# EAGLE board board-beta.0.2 (EAGLE 7.7.0)
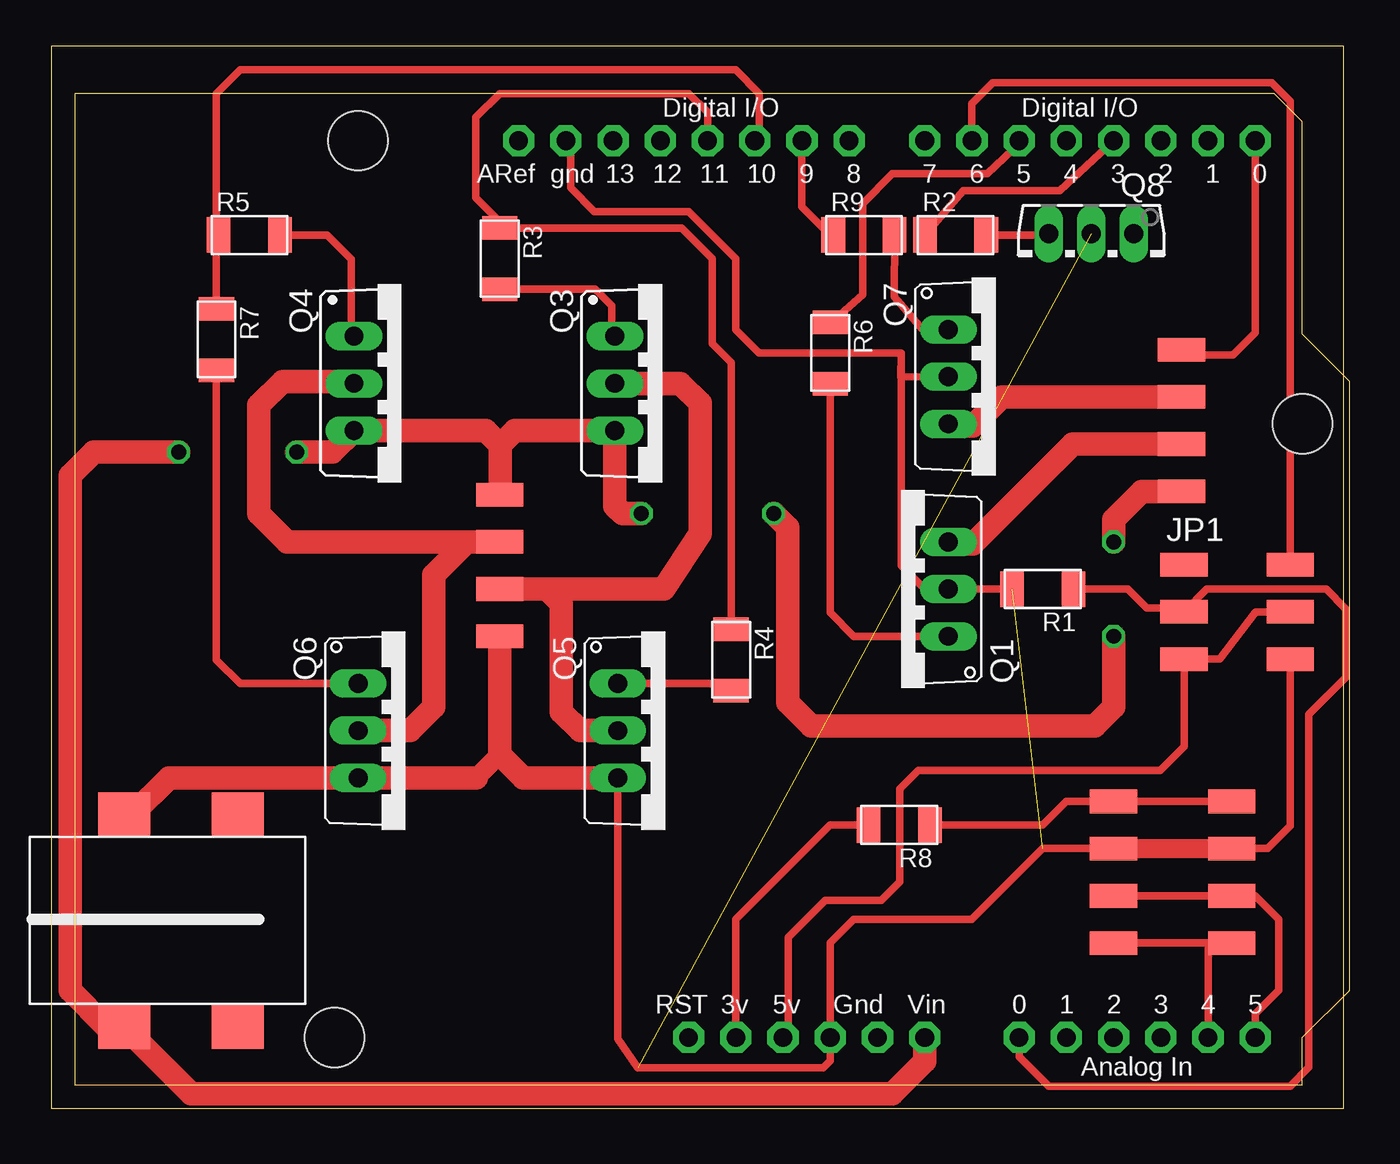
[diagram p0: board, top side]
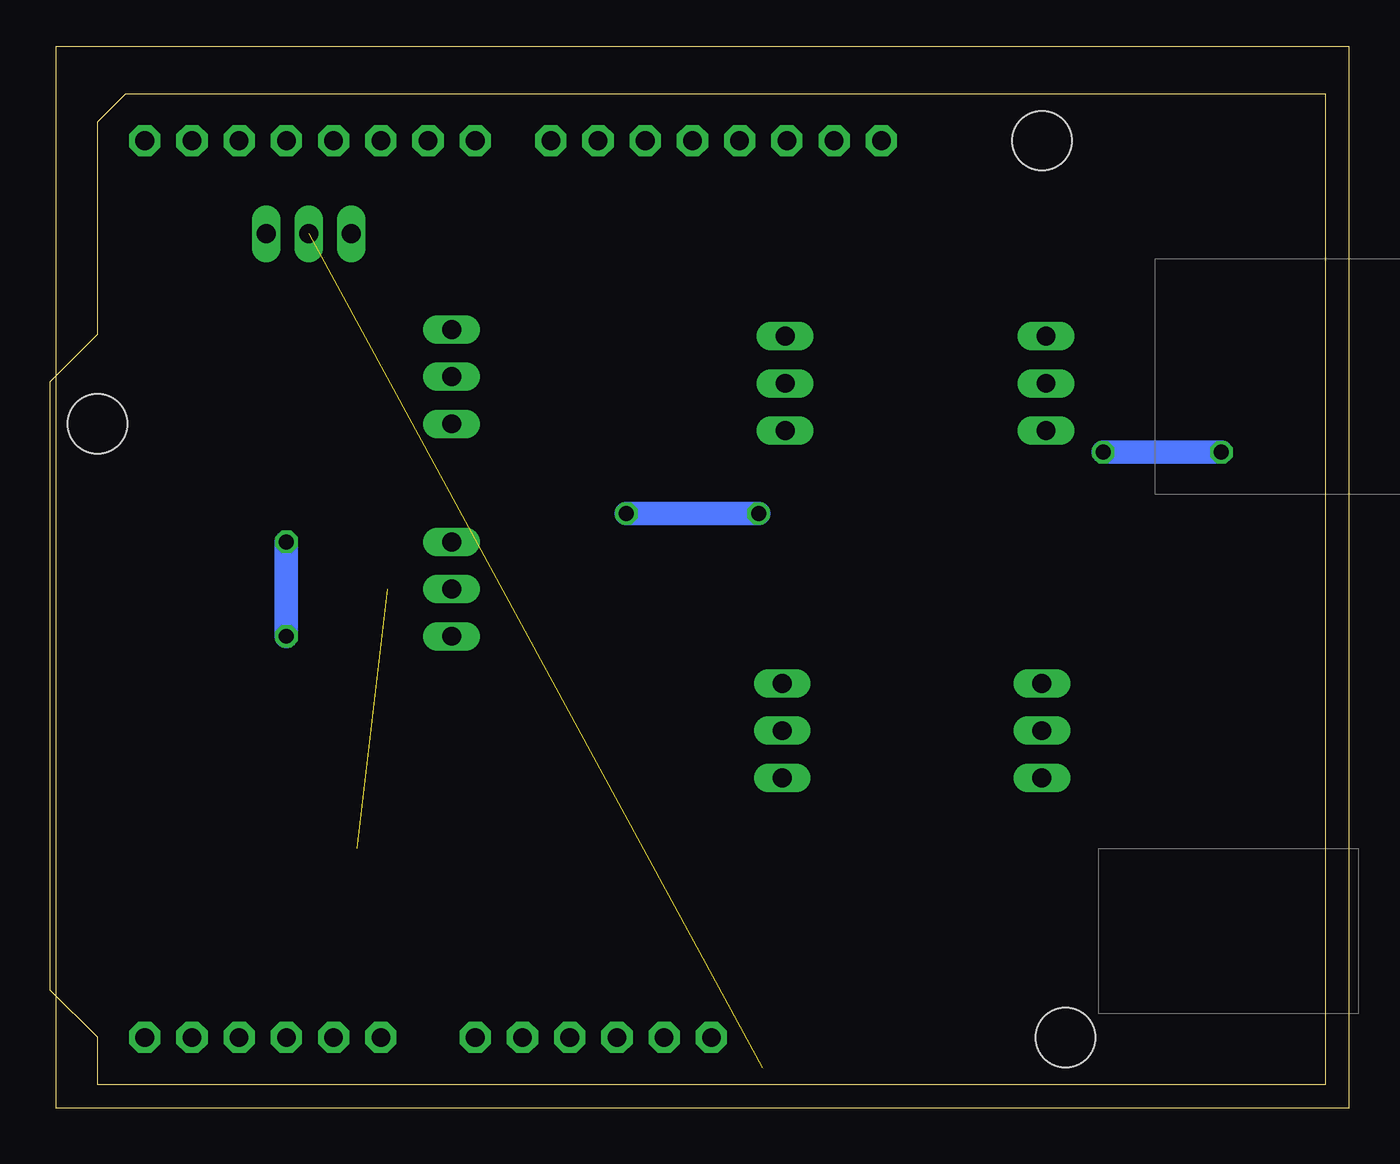
[diagram p1: board, bottom side, seen from below]

Size 69.52 x 57.14 mm. Coordinates in mm from the lower left corner, seen from the top.
Outline: 0,0 69.52,0 69.52,57.14 0,57.14 0,0
Copper layers (1*16): Top 0.035mm / dielectric 1.5mm / Bottom 0.035mm
Design rules "board12_1_3_5v": minimum track width 10mil, minimum drill 24mil, track to track 16mil, track to pad 0.205mm, pad to pad 0.205mm, via to via 0.205mm, smd to smd 6mil, copper to edge 40mil, drill to drill 8mil, minimum pad ring 10mil, minimum via ring 8mil, stop-mask expansion 4mil, vias tented up to drill 0mil, thermal gap 10mil

## Footprints (pad centres in the part's own frame; a part is rotated, then mirrored left to right if it is on the bottom)
1X4-SMT = smd 1.27 x 2.54: 1 -3.81,0; 2 -1.27,0; 3 1.27,0; 4 3.81,0
JACK_2.1MM = smd 2.388 x 2.794: CONTACT 5.766,-2.413; PIN -5.639,-2.413; PIN1 -5.639,3.683; SHUNT 5.766,3.683
2X03SMD = smd 2.54 x 1.27: 1 -2.857,2.54; 2 2.857,2.54; 3 -2.857,0; 4 2.857,0; 5 -2.857,-2.54; 6 2.857,-2.54
TO220V = drill 1.016 long: 1 -2.54,-2.54; 2 0,-2.54; 3 2.54,-2.54
TO220BV = drill 1.016 long: D 0,-2.54; G -2.54,-2.54; S 2.54,-2.54
TO126AV = drill 1.016 long: B 2.286,-1.27; C 0,-1.27; E -2.286,-1.27
R1206FAB = smd 1.27 x 1.905: 1 -1.651,0; 2 1.651,0
ARDUINO = drill 1 pad 1.676 octagon: 3V 35.56,2.54; 5V 38.1,2.54; A0 50.8,2.54; A1 53.34,2.54; A2 55.88,2.54; A3 58.42,2.54; A4 60.96,2.54; A5 63.5,2.54; AREF 23.876,50.8; D0 63.5,50.8; D1 60.96,50.8; D2 58.42,50.8; D3 55.88,50.8; D4 53.34,50.8; D5 50.8,50.8; D6 48.26,50.8; D7 45.72,50.8; D8 41.656,50.8; D9 39.116,50.8; D10 36.576,50.8; D11 34.036,50.8; D12 31.496,50.8; D13 28.956,50.8; GND 26.416,50.8; GND1 43.18,2.54; GND2 40.64,2.54; RESET 33.02,2.54; VIN 45.72,2.54 | hole 3.2: 15.24,50.8; 66.04,35.56; 13.97,2.54

## Placement (x,y rotation side)
CN2  1X4SMT  [1X4-SMT]  60.8,37.01 270 top
FAN2  1X4SMT  [1X4-SMT]  0.05,-9 0 top  (outside the outline)
H+T  1X4SMT  [1X4-SMT]  63.5,12.7 90 top
J1  JACK2.1MM  [JACK_2.1MM]  6.35,10.16 270 top
JP1  [2X03SMD]  63.8,26.71 0 top
LCD  1X4SMT  [1X4-SMT]  57.15,12.7 90 top
PELTIER  1X4SMT  [1X4-SMT]  24.13,29.21 90 top
Q1  IRF630N  [TO220V]  45.72,27.94 90 top
Q3  IRF9Z34  [TO220BV]  32.86,39.01 270 top
Q4  IRF9734  [TO220BV]  18.83,39.01 270 top
Q5  IRFZ44  [TO220V]  33.02,20.32 270 top
Q6  IRFZ44  [TO220V]  19.05,20.32 270 top
Q7  IRF630N  [TO220V]  50.8,39.37 270 top
Q8  BD139  [TO126AV]  55.95,45.79 180 top
R1  100k  [R1206FAB]  53.34,27.94 180 top
R2  1k  [R1206FAB]  48.65,46.99 0 top
R3  1k  [R1206FAB]  24.13,45.72 270 top
R4  1k  [R1206FAB]  36.58,24.13 270 top
R5  1k  [R1206FAB]  10.66,46.99 0 top
R6  1k  [R1206FAB]  41.91,40.64 270 top
R7  1k  [R1206FAB]  8.89,41.37 270 top
R8  0  [R1206FAB]  45.62,15.24 180 top
R9  1k  [R1206FAB]  43.72,46.99 0 top
U$1  ARDUINOUNO  [ARDUINO]  1.27,1.27 0 top

## Library data of the parts
CN2 FAN2 H+T LCD PELTIER Q1 Q5-Q7 U$1 = adafruit
J1 JP1 R1-R9 = fab
Q3 Q4 Q8 = transistor-power

## Nets
D0: CN2.1 U$1.D0
D1: U$1.D1
D2: U$1.D2
D3: R2.1 U$1.D3
D4: U$1.D4
D5: R6.1 U$1.D5
D6: JP1.2 U$1.D6
D9: R9.1 U$1.D9
D10: R5.1 R7.1 U$1.D10
D11: R3.1 R4.1 U$1.D11
FAN_1: CN2.3 Q1.3
FAN_2: Q8.E
GND: H+T.3 J1.PIN JP1.6 LCD.3 PELTIER.1 Q1.2 Q5.3 Q6.3 Q7.2 Q8.C R1.2 U$1.GND U$1.GND2
HT_VCC: H+T.4 LCD.4 R8.1
LED_1: CN2.2 Q7.3
N$1: Q1.1 R6.2
N$3: Q4.G R5.2
N$4: U$1.D8
N$5: Q3.G R3.2
N$7: R8.2 U$1.3V
N$8: U$1.D7
N$9: Q5.1 R4.2
N$10: Q6.1 R7.2
N$11: Q8.B R2.2
N$12: Q7.1 R9.2
N$13: U$1.D12
N$14: U$1.D13
N$16: U$1.AREF
N$19: U$1.A3
N$20: U$1.A2
N$21: U$1.A1
N$24: U$1.GND1
N$28: U$1.RESET
PEL_1: PELTIER.3 Q4.D Q6.2
PEL_2: PELTIER.2 Q3.D Q5.2
SCL: H+T.2 LCD.2 U$1.A5
SDA: H+T.1 LCD.1 U$1.A4
TEMP_1: JP1.3 R1.1 U$1.A0
VCC_5V: JP1.4 JP1.5 U$1.5V
VCC_12V: CN2.4 J1.CONTACT PELTIER.4 Q3.S Q4.S U$1.VIN

## Tracks (layer width: path | path; a pad name or v marks a point on that pad's centre or on a via)
D0
  Top 0.406: U$1.D0 64.77,41.75 63.55,40.53 61.09,40.53 CN2.1
D3
  Top 0.406: R2.1 48.55,48.79 49.05,49.39 54.25,49.39 55.67,50.69 U$1.D3
D5
  Top 0.406: R6.1 41.95,42.29 43.65,43.79 43.65,48.69 45.25,50.29 50.35,50.29 52.15,51.99 U$1.D5
D6
  Top 0.406: U$1.D6 49.53,54.07 50.65,55.19 65.65,55.19 66.65,54.19 JP1.2
D9
  Top 0.406: U$1.D9 40.39,48.51 41.91,46.99 R9.1
D10
  Top 0.406: R7.1 8.89,46.84 | 8.89,46.84 R5.1 | 8.89,46.84 8.89,54.61 10.16,55.88 36.83,55.88 38.1,54.61 38.1,52.32 U$1.D10
D11
  Top 0.406: U$1.D11 35.31,53.59 34.29,54.61 24.13,54.61 22.85,53.33 22.85,48.99 24.13,47.71 R3.1 33.91,47.37 35.56,45.72 35.56,41.15 36.58,40.13 R4.1
FAN_1
  Top 1.27: CN2.3 54.95,35.74 49.58,30.37 48.37,30.37 Q1.3
GND  (2 unrouted)
  Top 0.406: J1.PIN 4.37,15.8 | Q5.3 30.48,3.74 31.55,2.17 41.54,2.17 41.91,2.54 U$1.GND2 41.91,8.89 43.18,10.16 49.53,10.16 53.34,13.97 LCD.3 | R1.2 Q1.2 46.99,27.94 45.72,29.21 45.72,40.64 | U$1.GND 27.94,51.82 27.94,49.53 29.21,48.26 34.29,48.26 36.83,45.72 36.83,41.91 38.1,40.64 45.72,40.64 | 45.72,40.64 45.69,39.34 Q7.2 | H+T.3 65.43,13.97 66.65,15.19 JP1.6
  Top 1.016: 22.86,17.78 24.13,19.05 | LCD.3 H+T.3
  Top 1.27: 4.37,15.8 6.35,17.78 Q6.3 22.86,17.78 | PELTIER.1 24.13,19.05 25.4,17.78 Q5.3
HT_VCC
  Top 0.406: H+T.4 LCD.4 54.61,16.51 53.34,15.24 R8.1
LED_1
  Top 1.27: CN2.2 51.14,38.28 49.58,36.72 48.37,36.72 Q7.3
N$1
  Top 0.406: R6.2 41.91,26.67 43.18,25.4 Q1.1
N$3
  Top 0.406: R5.2 14.85,46.99 16.15,45.69 16.15,41.69 Q4.G
N$5
  Top 0.406: Q3.G 30.15,41.72 30.15,43.19 29.27,44.07 R3.2
N$7
  Top 0.406: U$1.3V 36.83,10.16 41.91,15.24 R8.2
N$9
  Top 0.406: Q5.1 35.41,22.86 R4.2
N$10
  Top 0.406: Q6.1 10.16,22.86 8.89,24.13 R7.2
N$11
  Top 0.406: R2.2 53.59,46.99 Q8.B
N$12
  Top 0.406: R9.2 45.35,43.69 46.85,41.92 Q7.1
PEL_1
  Top 1.27: PELTIER.3 22.35,30.48 | 22.35,30.48 12.7,30.48 11.18,32 11.18,37.85 12.45,39.12 16.18,39.12 Q4.D | Q6.2 19.3,20.32 20.57,21.59 20.57,28.7 22.35,30.48
PEL_2
  Top 0.406: 24.38,27.94 PELTIER.2
  Top 1.27: Q3.D 33.84,39.01 34.91,37.94 34.91,30.94 32.94,27.94 26.67,27.94 | 26.67,27.94 24.38,27.94 | Q5.2 28.45,20.32 27.43,21.34 27.43,27.17 26.67,27.94
SCL
  Top 0.406: LCD.2 H+T.2 64.77,11.43 66.04,10.16 66.04,6.35 64.77,5.08 U$1.A5
SDA
  Top 0.406: H+T.1 62.23,8.89 | 62.23,8.89 LCD.1 | U$1.A4 62.23,8.89
TEMP_1
  Top 0.406: U$1.A0 52.07,2.77 53.65,1.19 66.65,1.19 67.65,2.19 67.65,21.19 69.65,23.19 69.65,26.87 68.58,27.94 62.17,27.94 JP1.3 60.73,26.92 58.93,26.92 57.91,27.94 R1.1
VCC_5V
  Top 0.406: JP1.4 64.81,26.71 64.77,26.67 62.85,24.17 JP1.5 60.94,19.48 59.65,18.19 46.65,18.19 45.65,17.19 45.65,12.19 44.65,11.19 41.65,11.19 39.65,9.19 39.65,4.09 U$1.5V
VCC_12V  (via drill 0.8)
  Top 0.406: 24.15,33.04 PELTIER.4
  Top 1.27: 24.15,35.69 23.37,36.47 Q4.S 15.13,35.31 v13.21,35.31 | 24.15,35.69 24.15,33.04 | 24.15,35.69 24.93,36.47 Q3.S 30.32,32.42 30.73,32 v31.75,32 | v6.86,35.31 2.29,35.31 1.02,34.04 1.02,6.35 2.97,4.39 J1.CONTACT 7.54,0.79 45.25,0.79 46.99,2.53 U$1.VIN | v38.86,32 39.62,31.24 39.62,21.84 40.89,20.57 56.13,20.57 57.15,21.59 v57.15,25.4 | v57.15,30.48 57.15,31.68 58.67,33.2 CN2.4
  Bottom 1.27: v6.86,35.31 v13.21,35.31 | v31.75,32 v38.86,32 | v57.15,25.4 v57.15,30.48